# Altium PCB rone12_to_rone13.PcbDoc
Units mil, origin at the board's own origin, x right, y up, seen from the top; angles counter-clockwise.
Board outline 2000 x 1000 mil, 2 copper layers (Top Layer, Bottom Layer); 6 components, 13 nets, 34 pads, 11 vias.
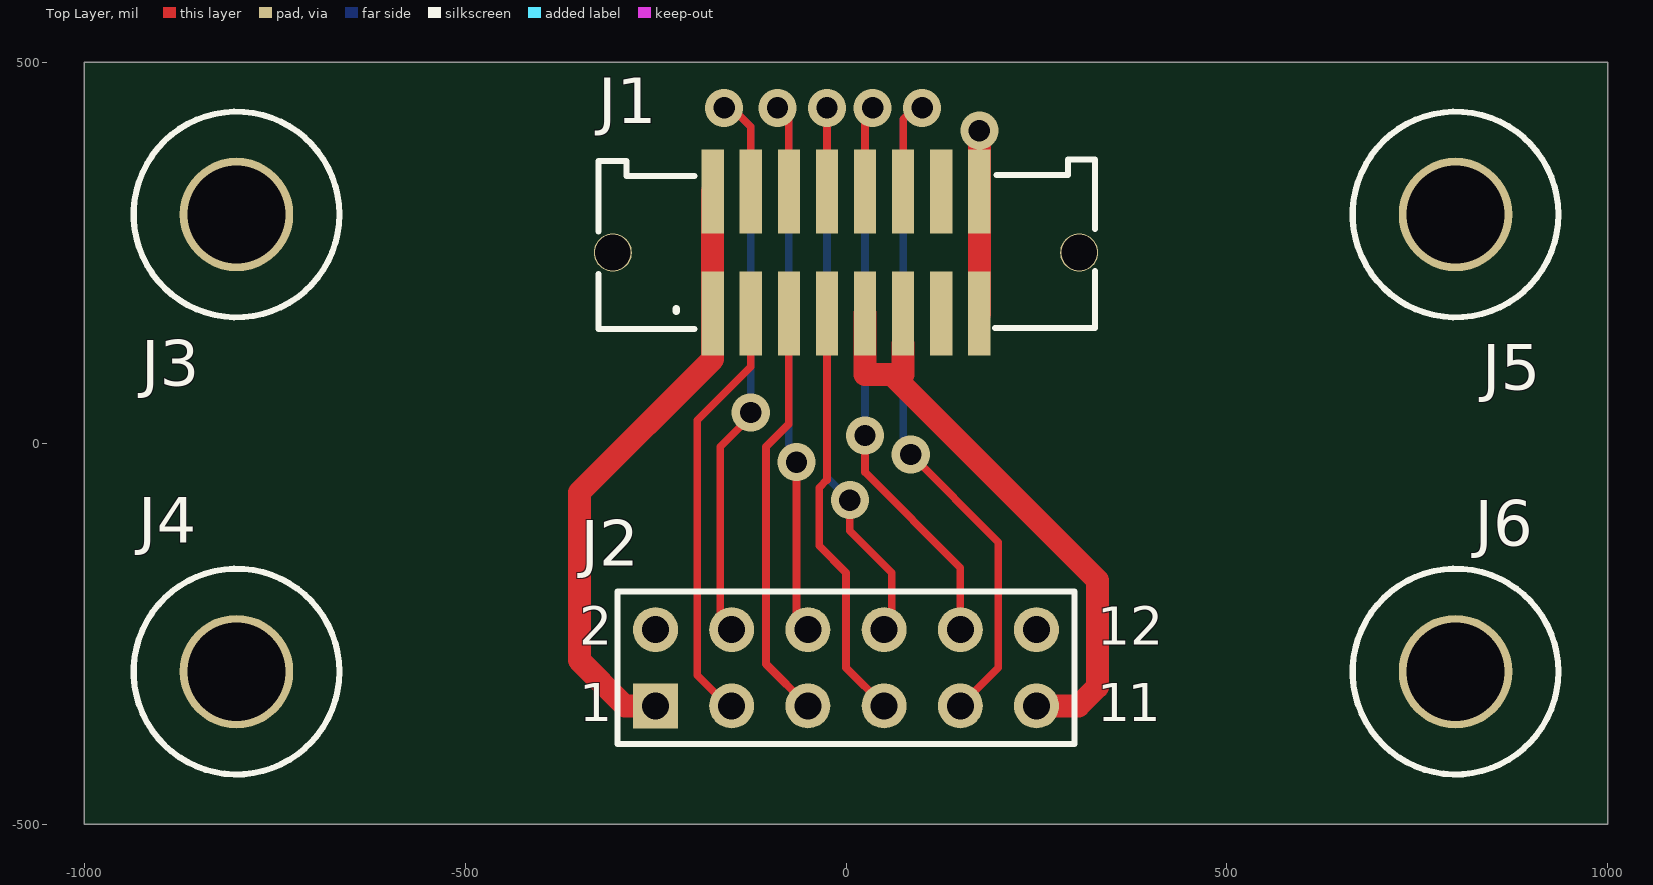
[diagram p0: Top Layer view]
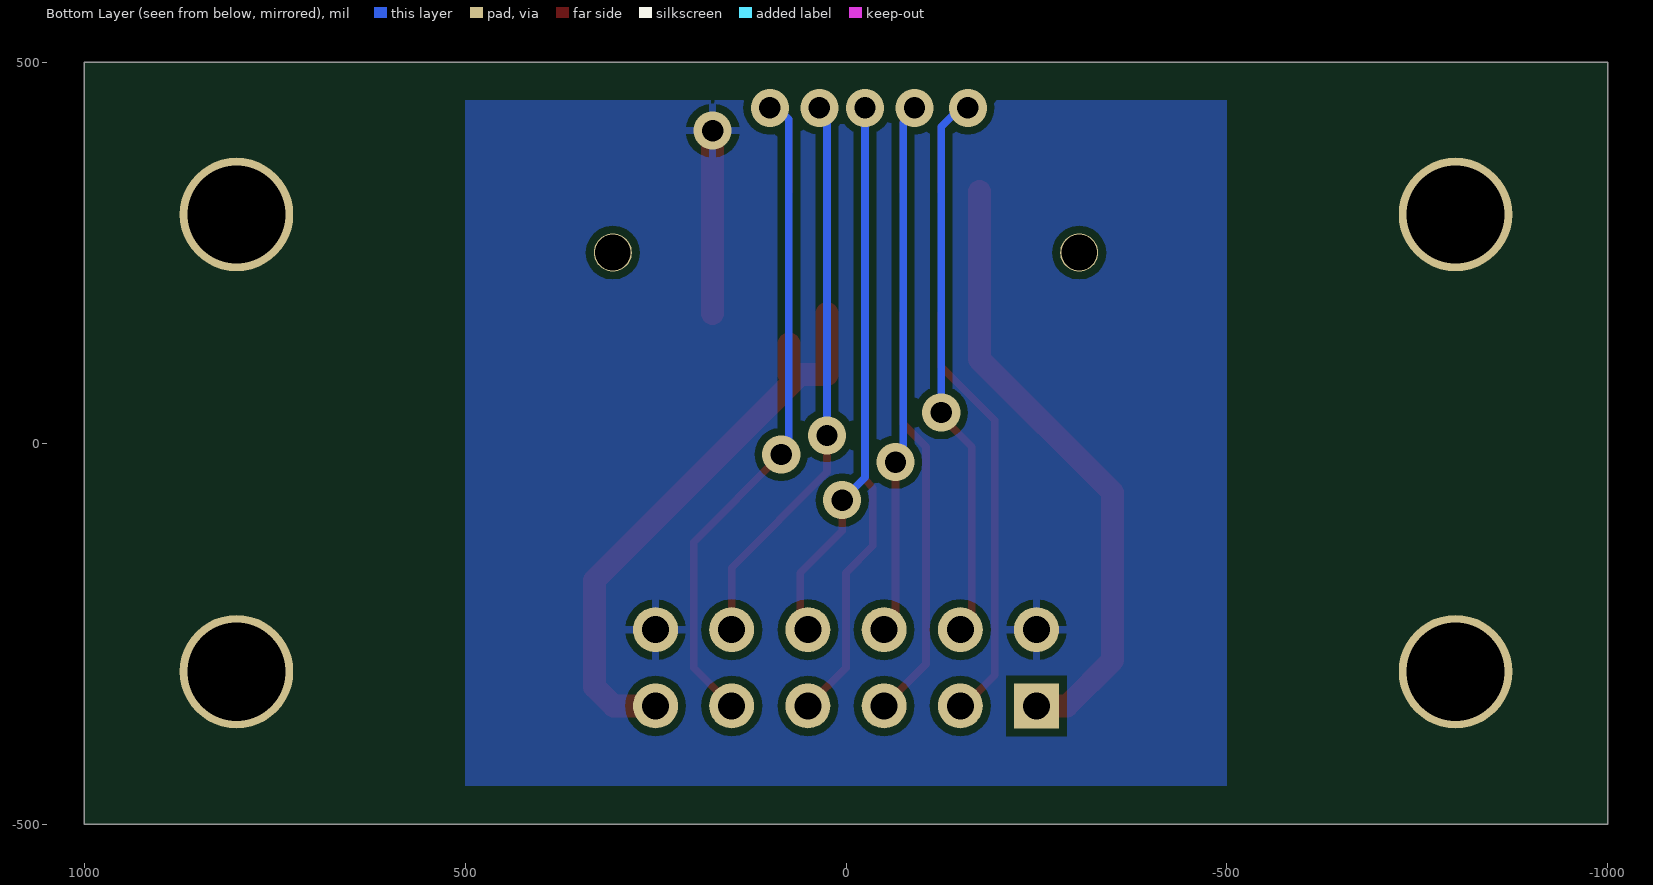
[diagram p1: Bottom Layer view, seen from below]

## Layer stack, top to bottom
Top Layer: signal copper 1.4
Dielectric: dielectric 12.6, FR-4, Dk 4.8
Bottom Layer: signal copper 1.4

## Board outline
-1000,500 1000,500 1000,-500 -1000,-500

## Design rules (kind name [scope] priority, off if disabled: settings)
Clearance [All] p1: gap=10
PolygonConnect [All] p1: connectstyle=Relief reliefconductorwidth=10 reliefentries=4 polygonreliefangle="90 Angle"
RoutingVias [All] p1: holewidth=28 width=50 viastyle="Through Hole" minholewidth=28 minwidth=50 maxholewidth=28 maxwidth=50
SilkscreenOverComponentPads [All] p1: minsilkscreentomaskgap=10
SolderMaskExpansion [All] p1: expansion=4
Width [All] p1: maxlimit=30 minlimit=10 preferedwidth=20 minimp=50.000000 maximp=50.000000 favimp=50.000000
27 further rules are at their usual default settings.

## Classes and differential pairs
component class rone12_to_rone13: J1 J2 J3 J4 J5

## Components (designator, comment, footprint, x,y, rotation, side; value= is the part's Value field where it differs from the comment)
J1 "header" "HEADERSM 8X2" 0,250 r90 top
J2 "Header 6X2" HDR2X6 -250,-345 r0 top
J3 "#4 Screw Hole" #4_Screw_Hole -800,300 r0 top
J4 "#4 Screw Hole" #4_Screw_Hole -800,-300 r0 top
J5 "#4 Screw Hole" #4_Screw_Hole 800,300 r0 top
J6 "#4 Screw Hole" #4_Screw_Hole 800,-300 r0 top

## Footprints (in the part's own frame and the unit in brackets; to place one, negate y for a bottom-side part, rotate by r counter-clockwise, add the part's x,y. Pads: shape width x height; smd on the part's side, far side on the other; paste and mask are expansions set on the pad)
#4_Screw_Hole [mil] "#4 Screw Hole, 3.2766mm Hole Dia., Plated"
  round 149 hole 129: 1(0,0)
  silkscreen extent -135,-135 135,135
HDR2X6 [mm] "Connector; Header; 6x2 Position"
  rect 1.5x1.5 hole 0.9: 1(0,0)
  round 1.5 hole 0.9: 2(0,2.54) 3(2.54,0) 4(2.54,2.54) 5(5.08,0) 6(5.08,2.54) 7(7.62,0) 8(7.62,2.54) 9(10.16,0) 10(10.16,2.54) 11(12.7,0) 12(12.7,2.54)
  silkscreen extent -1.27,-1.27 13.97,3.81
"HEADERSM 8X2" [mm]
  rect 2.795x0.74 smd: 1(-2.032,4.445) 2(2.033,4.445) 3(-2.032,3.175) 4(2.033,3.175) 5(-2.032,1.905) 6(2.033,1.905) 7(-2.032,0.635) 8(2.033,0.635) 9(-2.032,-0.635) 10(2.033,-0.635) 11(-2.032,-1.905) 12(2.033,-1.905) 13(-2.032,-3.175) 14(2.033,-3.175) 15(-2.032,-4.445) 16(2.033,-4.445)
  round 1.27 hole 1.19: c1(0,7.773) c2(0,-7.772)
  silkscreen extent -2.54,-8.29 3.1,8.26

## Part data
J1: library part "HEADER 8X2"
J2: "Header, 6-Pin, Dual row"
J3 J4 J5 J6: library part Mechanical_Hole, "A mechanical hole for mounting the board"

## Via types
v1: diameter 50, hole 28, Top Layer to Bottom Layer, 11 vias

## Nets (pads, with @x,y where several pads share a name; then routed paths per layer and width w, separated by ;. In a path a pad name is that pad's centre, name@x,y a point inside that pad or via, vN(x,y) a via of type N, cw(c..) or ccw(c..) an arc to the next point about the centre after c; other vN are vias at no path point)
3.3V: J1.1 J1.2 J2.1 | length 812.4
  Top Layer w30: J2.1 -290,-345 -350,-285 -350,-65 -175,110 J1.1 J1.2
FTDI_RX: J1.5 J2.5 | length 550.2
  Top Layer w10: J1.5 -75,25 -105,-5 -105,-290 J2.5
FTDI_TX: J1.7 J2.7 | length 554.3
  Top Layer w10: J1.7 -25,-48.43 -35,-58.43 -35,-135 0,-170 0,-295 J2.7
GND: J1.15 J1.16 J2.2 J2.12 | length 240
  Top Layer w30: J1.15 J1.16 v1(175,410)
I2C_SCL: J1.13
I2C_SDA: J1.14
RESET: J1.3 J2.3 | length 565.5
  Top Layer w10: J2.3 -155,-345 -195,-305 -195,30 -125,100 J1.3
SPI_CLK: J1.4 J2.4 | length 848.5
  Top Layer w10: v1(-160,440) -150,440 -125,415 J1.4 ; J2.4 -165,-230 -165,-5 -125,35 v1(-125,40)
  Bottom Layer w10: v1@-150,440 -125,415 v1(-125,40)
SPI_MISO: J1.6 J2.6 | length 823.6
  Top Layer w10: v1(-90,440) -75,425 J1.6 ; v1(-65,-25) -65,-230 J2.6
  Bottom Layer w10: v1(-90,440) -90,435 -75,420 -75,-25 v1(-65,-25)
SPI_MOSI: J1.8 J2.8 | length 834.3
  Top Layer w10: J1.8 v1(-25,440) ; v1(5,-75) 5,-115 60,-170 60,-235 J2.8
  Bottom Layer w10: v1(-25,440) -25,-45 v1(5,-75)
SPI_SEL_EXPAND0: J1.10 J2.10 | length 862.1
  Top Layer w10: v1(25,10) 25,-38.43 150,-163.43 J2.10 ; J1.10 25,430 v1(35,440)
  Bottom Layer w10: v1@20,5 v1(25,10) 25,420 35,430 v1(35,440)
SPI_SEL_EXPAND1: J1.12 J2.9 | length 1004
  Top Layer w10: J1.12 75,425 95,445 v1(100,440) ; v1(85,-15) 200,-130 200,-295 J2.9
  Bottom Layer w10: v1(85,-15) 75,-5 75,425 90,440 v1(100,440)
VBAT: J1.9 J1.11 J2.11 | length 782.2
  Top Layer w30: J1.9 25,90 75,90 J1.11@75,129.98 ; 60,90 330,-180 330,-320 305,-345 J2.11
pads on no net: J1.c1 J1.c2 J3.1 J4.1 J5.1 J6.1

## Polygon pours and split planes (outlines as drawn)
GND on Bottom Layer "GND" (solid, pour order 2): -500,450 -500,-450 500,-450 500,450

## Silkscreen, mask and mechanical layers (free items; w line width, h text height)
Mechanical 3:
  lines w10: -1000,-500 -1000,505 1000,505 1000,-495 995,-500 -1000,-500

## Text inside footprints (layer, text, board x,y; h text height)
J2: Top Overlay "12" at 330,-265 h50; Top Overlay "1" at 370,-365 h50; Top Overlay "1" at 330,-365 h50; Top Overlay "1" at -350,-365 h50; Top Overlay "2" at -350,-265 h50